# EAGLE board Brians test board 12 (EAGLE 6.5.0)
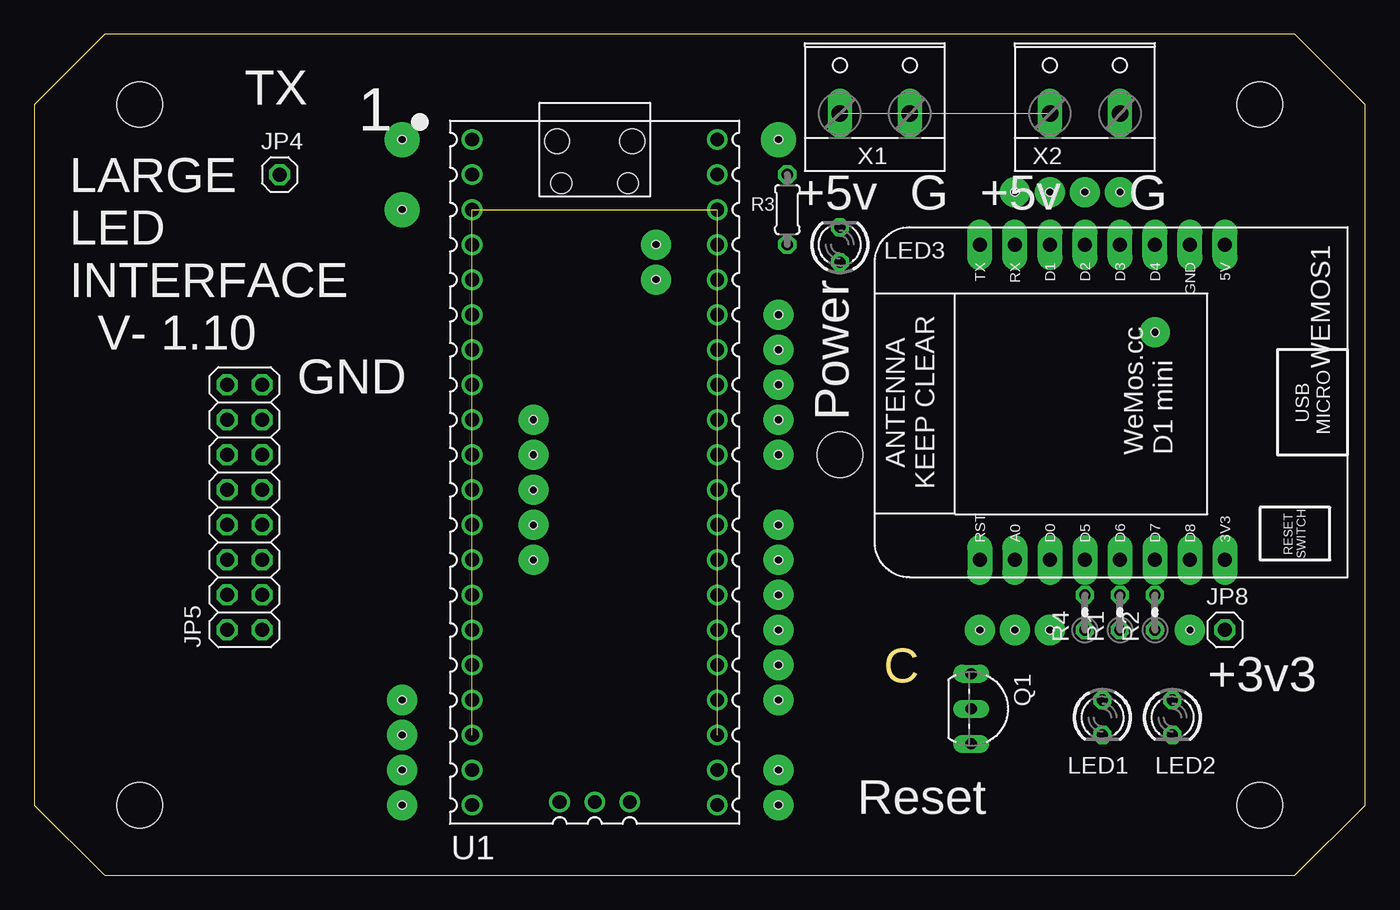
[diagram p0: board, top side]
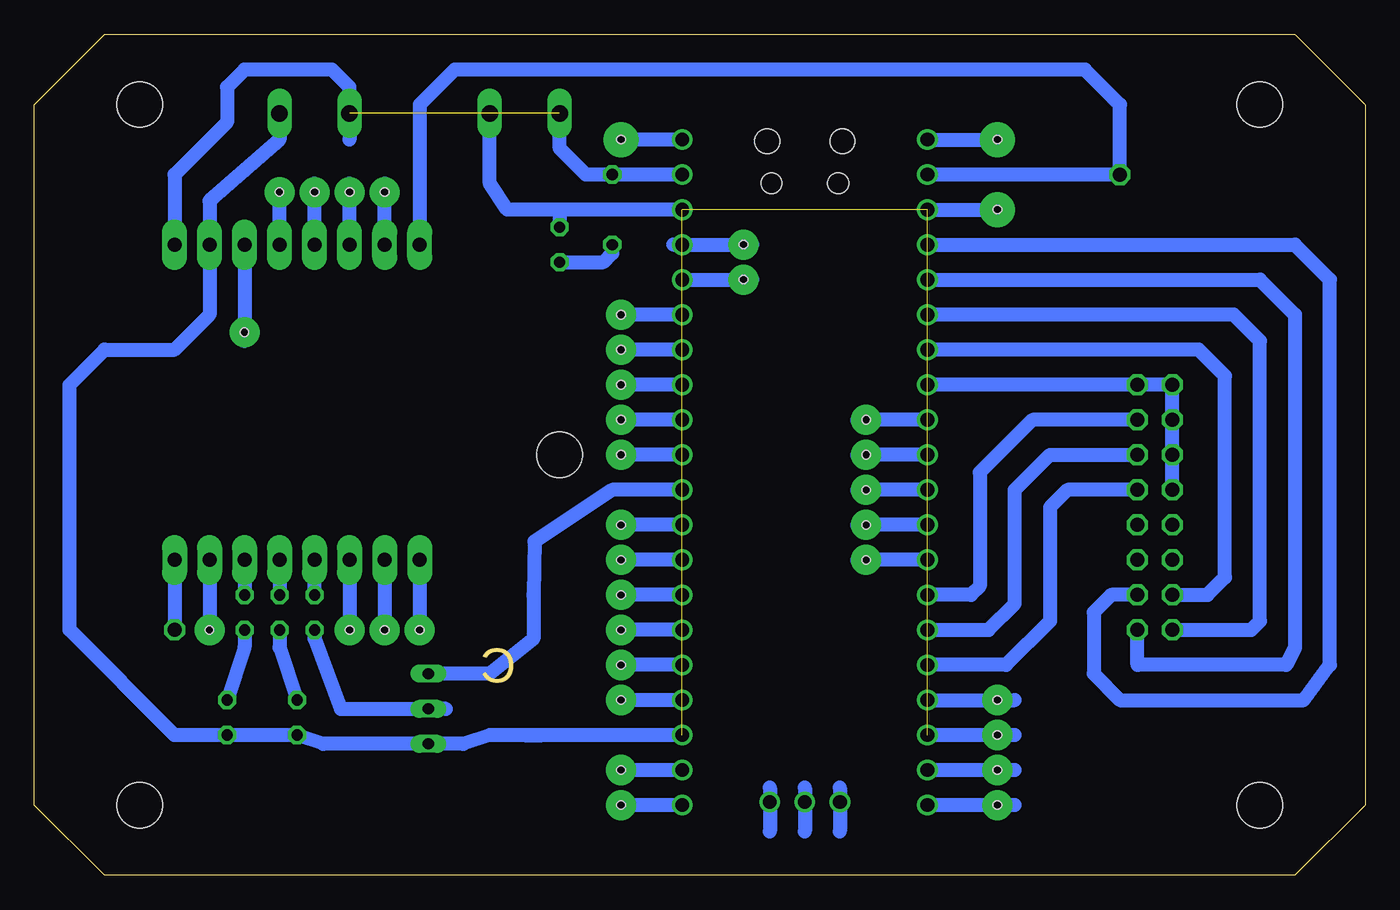
[diagram p1: board, bottom side, seen from below]

Size 96.52 x 60.96 mm. Coordinates in mm from the lower left corner, seen from the top.
Outline: 0,5.08 5.08,0 91.44,0 96.52,5.08 96.52,55.88 91.44,60.96 5.08,60.96 0,55.88 0,5.08
Copper layers (1*16): Top 0.035mm / dielectric 1.5mm / Bottom 0.035mm
Design rules "default": minimum track width 10mil, minimum drill 24mil, track to track 8mil, track to pad 8mil, pad to pad 8mil, via to via 8mil, smd to smd 8mil, copper to edge 40mil, drill to drill 8mil, minimum pad ring 10mil, minimum via ring 8mil, stop-mask expansion 4mil, vias tented up to drill 0mil, thermal gap 10mil
Holes 3.3 mm at 7.62,55.88 88.9,55.88 7.62,5.08 88.9,5.08 58.42,30.48
Holes 0.6 mm at 26.67,53.34 26.67,48.26 36.2,33.02 36.2,30.48 36.2,27.94 36.2,25.4 36.2,22.86 26.67,12.7 26.67,10.16 26.67,7.62 26.67,5.08 53.98,53.34 53.98,40.64 53.98,38.1 53.98,35.56 53.98,33.02 53.98,30.48 53.98,22.86 53.98,20.32 53.98,17.78 53.98,15.24 53.98,12.7 53.98,7.62 53.98,5.08 45.09,45.72 45.09,43.18 53.98,25.4 71.12,49.53 73.66,49.53 76.2,49.53 78.74,49.53 81.28,39.37 83.82,17.78 73.66,17.78 71.12,17.78 68.58,17.78

## Footprints (pad centres in the part's own frame; a part is rotated, then mirrored left to right if it is on the bottom)
1X01 = drill 1.016 octagon: 1 0,0
2X08 = drill 1.016 octagon: 1 -8.89,-1.27; 2 -8.89,1.27; 3 -6.35,-1.27; 4 -6.35,1.27; 5 -3.81,-1.27; 6 -3.81,1.27; 7 -1.27,-1.27; 8 -1.27,1.27; 9 1.27,-1.27; 10 1.27,1.27; 11 3.81,-1.27; 12 3.81,1.27; 13 6.35,-1.27; 14 6.35,1.27; 15 8.89,-1.27; 16 8.89,1.27
LED3MM = drill 0.813 octagon: A -1.27,0; K 1.27,0
TO92-EBC = drill 0.813 long: B 0,-1.27; C -2.54,-1.27; E 2.54,-1.27
0204V = drill 0.813 octagon: 1 -1.27,0; 2 1.27,0
0204/5 = drill 0.813 octagon: 1 -2.54,0; 2 2.54,0
PICO-PKG-TH = drill 1: 1 -8.89,24.13; 2 -8.89,21.59; 3 -8.89,19.05; 4 -8.89,16.51; 5 -8.89,13.97; 6 -8.89,11.43; 7 -8.89,8.89; 8 -8.89,6.35; 9 -8.89,3.81; 10 -8.89,1.27; 11 -8.89,-1.27; 12 -8.89,-3.81; 13 -8.89,-6.35; 14 -8.89,-8.89; 15 -8.89,-11.43; 16 -8.89,-13.97; 17 -8.89,-16.51; 18 -8.89,-19.05; 19 -8.89,-21.59; 20 -8.89,-24.13; 21 8.89,-24.13; 22 8.89,-21.59; 23 8.89,-19.05; 24 8.89,-16.51; 25 8.89,-13.97; 26 8.89,-11.43; 27 8.89,-8.89; 28 8.89,-6.35; 29 8.89,-3.81; 30 8.89,-1.27; 31 8.89,1.27; 32 8.89,3.81; 33 8.89,6.35; 34 8.89,8.89; 35 8.89,11.43; 36 8.89,13.97; 37 8.89,16.51; 38 8.89,19.05; 39 8.89,21.59; 40 8.89,24.13; 41 -2.54,-23.9; 42 0,-23.9; 43 2.54,-23.9 | hole 1.8: -2.725,24; 2.725,24 | hole 1.5: -2.425,20.97; 2.425,20.97
WEMOS-D1-MINI = drill 1.016 pad 1.829 long: 3V3 -10.16,-10.16; 5V 12.7,-10.16; A0 -10.16,5.08; D0 -10.16,2.54; D1 12.7,2.54; D2 12.7,0; D3 12.7,-2.54; D4 12.7,-5.08; D5 -10.16,0; D6 -10.16,-2.54; D7 -10.16,-5.08; D8 -10.16,-7.62; GND 12.7,-7.62; RESET -10.16,7.62; RX 12.7,5.08; TX 12.7,7.62
W237-132 = drill 1.194 long: 1 -2.54,-0.635; 2 2.54,-0.635

## Placement (x,y rotation side)
JP4  [1X01]  17.78,50.8 0 top
JP5  [2X08]  15.24,26.67 90 top
JP8  [1X01]  86.36,17.78 0 top
LED1  [LED3MM]  77.47,11.43 270 top
LED2  [LED3MM]  82.55,11.43 270 top
LED3  [LED3MM]  58.42,45.72 90 top
Q1  BC548  [TO92-EBC]  69.22,12.06 270 top
R1  [0204V]  78.74,19.05 90 top
R2  [0204V]  81.28,19.05 90 top
R3  [0204/5]  54.61,48.26 270 top
R4  [0204V]  76.2,19.05 90 top
U1  RASPBERRY_PICOTH  [PICO-PKG-TH]  40.64,29.21 0 top
WEMOS1  [WEMOS-D1-MINI]  76.2,33.02 90 top
X1  [W237-132]  60.96,55.88 0 top
X2  [W237-132]  76.2,55.88 0 top

## Library data of the parts
JP4 JP5 JP8 = pinhead
LED1-LED3 = led
Q1 = transistor-npn
R1-R4 = rcl
U1 = RpiPico
WEMOS1 = esp8266modules
X1 X2 = con-wago-508; OC_FARNELL: unknown; OC_NEWARK: unknown

## Nets
3V3(OUT): U1.36
+5V: R3.1 U1.39 WEMOS1.5V X1.1 X2.1
GND: JP5.10 JP5.12 JP5.14 JP5.15 JP5.16 LED1.K LED2.K LED3.K Q1.E U1.3 U1.8 U1.13 U1.18 U1.23 U1.28 U1.33 U1.38 WEMOS1.GND X1.2 X2.2
N$3: JP5.1 U1.5
N$4: JP8.1 WEMOS1.3V3
N$6: Q1.C U1.30
N$7: JP4.1 U1.2 WEMOS1.TX
N$8: JP5.3 U1.4
N$9: R2.2 WEMOS1.D7
N$10: JP5.13 U1.14
N$11: JP5.11 U1.15
N$12: JP5.9 U1.16
N$13: JP5.2 U1.6
N$14: JP5.4 U1.7
N$15: R1.2 WEMOS1.D6
N$17: LED2.A R2.1
N$18: LED1.A R1.1
N$19: LED3.A R3.2
N$47: R4.2 WEMOS1.D5
N$48: Q1.B R4.1
NC1: JP5.7
NC2: JP5.5
NC3: JP5.6
NC4: JP5.8
SWGND: U1.42
VBUS: U1.40

## Tracks (layer width: path | path; a pad name or v marks a point on that pad's centre or on a via)
+5V  (1 unrouted)
  Bottom 1: U1.39 R3.1 56.52,50.8 58.42,52.7 X1.1 58.42,55.88 | 73.66,53.34 X2.1 73.66,57.15 74.93,58.42 81.28,58.42 82.55,57.15 82.55,54.61 86.36,50.8 WEMOS1.5V
GND  (7 unrouted)
  Bottom 1: JP5.10 JP5.12 JP5.14 JP5.16 JP5.15 U1.8 | U1.38 58.42,48.26 | 58.42,48.26 LED3.K | X2.2 78.74,53.34 83.82,48.9 WEMOS1.GND 83.82,40.64 86.36,38.1 91.44,38.1 93.98,35.56 93.98,17.78 86.36,10.16 LED2.K LED1.K 75.56,9.53 Q1.E 65.41,9.53 63.5,10.16 U1.23 | 58.42,48.26 62.23,48.26 63.5,50.16 X1.2
  Bottom 1.016: U1.23 50.8,10.16
N$2
  Bottom 1: 60.96,10.16 59.69,10.16
N$3
  Bottom 1: U1.5 7.62,43.18 5.08,40.64 5.08,16.51 5.71,15.24 16.51,15.24 JP5.1
N$4
  Bottom 1: WEMOS1.3V3 JP8.1
N$6
  Bottom 1: U1.30 54.61,27.94 60.25,24.21 60.33,20.32 60.33,17.14 63.5,14.61 Q1.C
N$7
  Bottom 1: WEMOS1.TX 68.58,55.88 66.04,58.42 20.32,58.42 17.78,55.88 JP4.1 U1.2
N$8
  Bottom 1: U1.4 5.08,45.72 2.54,43.18 2.54,15.24 4.45,12.7 17.78,12.7 19.68,14.61 19.68,19.05 18.41,20.32 JP5.3
N$9
  Bottom 1: WEMOS1.D7 R2.2
N$10
  Bottom 1: JP5.13 24.13,33.02 27.94,29.21 27.94,20.95 28.57,20.32 U1.14
N$11
  Bottom 1: U1.15 27.3,17.78 25.4,19.68 25.4,27.94 22.86,30.48 JP5.11
N$12
  Bottom 1: JP5.9 21.59,27.94 22.86,26.67 22.86,18.41 26.04,15.24 U1.16
N$13
  Bottom 1: JP5.2 8.26,17.78 7.62,18.41 7.62,38.73 9.53,40.64 31.11,40.64 U1.6
N$14
  Bottom 1: JP5.4 11.43,20.32 10.16,21.59 10.16,36.2 12.06,38.1 U1.7
N$15
  Bottom 1: WEMOS1.D6 R1.2
N$17
  Bottom 1: R2.1 81.28,16.51 LED2.A
N$18
  Bottom 1: R1.1 78.74,16.51 LED1.A
N$19
  Bottom 1: LED3.A 55.24,44.45 54.61,45.09 R3.2
N$20  (via drill 0.6 pad 2.18)
  Bottom 1: 31.75,12.7 v26.67,12.7 25.4,12.7
N$21  (via drill 0.6 pad 2.18)
  Bottom 1: 25.4,10.16 v26.67,10.16 31.75,10.16
N$22  (via drill 0.6 pad 2.18)
  Bottom 1: 25.4,7.62 v26.67,7.62 31.75,7.62
N$23  (via drill 0.6 pad 2.18)
  Bottom 1: 25.4,5.08 v26.67,5.08 31.75,5.08
N$24  (via drill 0.6 pad 2.18)
  Bottom 1: 49.53,5.08 v53.98,5.08
N$25  (via drill 0.6 pad 2.18)
  Bottom 1: 49.53,7.62 v53.98,7.62
N$26  (via drill 0.6 pad 2.18)
  Bottom 1: 49.53,12.7 v53.98,12.7
N$27  (via drill 0.6 pad 2.18)
  Bottom 1: 49.53,15.24 v53.98,15.24
N$28  (via drill 0.6 pad 2.18)
  Bottom 1: 49.53,17.78 v53.98,17.78
N$29  (via drill 0.6 pad 2.18)
  Bottom 1: 49.53,20.32 v53.98,20.32
N$30  (via drill 0.6 pad 2.18)
  Bottom 1: 49.53,22.86 v53.98,22.86
N$31  (via drill 0.6 pad 2.18)
  Bottom 1: 49.53,30.48 v53.98,30.48
N$32  (via drill 0.6 pad 2.18)
  Bottom 1: 49.53,33.02 v53.98,33.02
N$33
  Bottom 1: 38.1,6.35 38.1,3.17
N$34  (via drill 0.6 pad 2.18)
  Bottom 1: 49.53,35.56 v53.98,35.56
N$35  (via drill 0.6 pad 2.18)
  Bottom 1: 49.53,38.1 v53.98,38.1
N$36  (via drill 0.6 pad 2.18)
  Bottom 1: 49.53,40.64 v53.98,40.64
N$37
  Bottom 1: 40.64,6.35 40.64,3.17
N$38
  Bottom 1: 43.18,6.35 43.18,3.17
N$39  (via drill 0.6 pad 2.54)
  Bottom 1: 49.53,53.34 v53.98,53.34 54.61,53.34
N$40  (via drill 0.6 pad 2.54)
  Bottom 1: 31.75,53.34 v26.67,53.34 26.04,53.34
N$42  (via drill 0.6 pad 2.18)
  Bottom 1: 31.75,33.02 v36.2,33.02 36.83,33.02
N$43  (via drill 0.6 pad 2.18)
  Bottom 1: 31.75,30.48 v36.2,30.48 36.83,30.48
N$44  (via drill 0.6 pad 2.18)
  Bottom 1: 31.75,27.94 v36.2,27.94 36.83,27.94
N$45  (via drill 0.6 pad 2.18)
  Bottom 1: 31.75,25.4 v36.2,25.4 36.83,25.4
N$46  (via drill 0.6 pad 2.18)
  Bottom 1: 31.75,22.86 v36.2,22.86 36.83,22.86
N$47
  Bottom 1: R4.2 WEMOS1.D5
N$48
  Bottom 1: R4.1 76.2,17.14 74.3,12.06 Q1.B 66.67,12.06
N$53  (via drill 0.6 pad 2.18)
  Bottom 1: 83.82,22.86 v83.82,17.78
N$54  (via drill 0.6 pad 2.18)
  Bottom 1: 73.66,22.86 v73.66,17.78
N$55  (via drill 0.6 pad 2.18)
  Bottom 1: 71.12,22.86 v71.12,17.78
N$56  (via drill 0.6 pad 2.18)
  Bottom 1: 68.58,22.86 v68.58,17.78
N$57  (via drill 0.6 pad 2.54)
  Bottom 1: 31.75,48.26 v26.67,48.26 26.04,48.26
N$58  (via drill 0.6 pad 2.18)
  Bottom 1: 50.16,45.72 v45.09,45.72 44.45,45.72
N$59  (via drill 0.6 pad 2.18)
  Bottom 1: 49.53,43.18 v45.09,43.18 44.45,43.18
N$60  (via drill 0.6 pad 2.18)
  Bottom 1: 49.53,25.4 v53.98,25.4
N$61  (via drill 0.6 pad 2.18)
  Bottom 1: 71.12,45.72 v71.12,49.53 71.12,50.16
N$62  (via drill 0.6 pad 2.18)
  Bottom 1: 73.66,45.72 v73.66,49.53 73.66,50.16
N$63  (via drill 0.6 pad 2.18)
  Bottom 1: 76.2,45.72 v76.2,49.53 76.2,50.16
N$64  (via drill 0.6 pad 2.18)
  Bottom 1: 78.74,45.72 v78.74,49.53
N$65  (via drill 0.6 pad 2.18)
  Bottom 1: 81.28,45.72 v81.28,39.37 81.28,38.73

## Text on the board
tPlace: TX | 1 | +5v | G | +5v | G | Power | LARGE / LED / INTERFACE / V- 1.10 | GND | +3v3 | Reset
Milling: C